# EAGLE board Password Security Access System (EAGLE 9.7.0)

Size 244.47 x 169.61 mm. Coordinates in mm from the lower left corner, seen from the top.
Outline: 0,0 244.47,0 244.47,169.61 0,169.61 0,0
Copper layers (1*16): Top 0.035mm / dielectric 1.5mm / Bottom 0.035mm
Design rules "default": minimum track width 6mil, minimum drill 0.35mm, track to track 6mil, track to pad 6mil, pad to pad 6mil, via to via 6mil, smd to smd 6mil, copper to edge 40mil, drill to drill 6mil, minimum pad ring 10mil, minimum via ring 8mil, stop-mask expansion 4mil, vias tented up to drill 0mil, thermal gap 10mil

## Footprints (pad centres in the part's own frame; a part is rotated, then mirrored left to right if it is on the bottom)
LEDRD254W60D565H860B_G = drill 0.981 pad 1.581: 1 -1.27,0; 2 1.27,0
LEDRD254W60D565H860B = drill 0.981 pad 1.581: 1 -1.27,0; 2 1.27,0
1X08 = drill 1.016 long: 1 -8.89,0; 2 -6.35,0; 3 -3.81,0; 4 -1.27,0; 5 1.27,0; 6 3.81,0; 7 6.35,0; 8 8.89,0
PIEZO = drill 1 pad 1.6: 1 -3.5,0; 2 3.5,0
RESAD1016W63L850D250B = drill 0.83 pad 1.43: 1 -5.08,0; 2 5.08,0
SG90 = drill 1.016 long: 1 -2.54,0; 2 0,0; 3 2.54,0
ARDUINO-UNO-R3-SHIELD = drill 1.016 pad 1.88: 3.3V 24.13,-2.54; 5V 24.13,0; A0 24.13,12.7; A1 24.13,15.24; A2 24.13,17.78; A3 24.13,20.32; A4 24.13,22.86; A5 24.13,25.4; AREF -24.13,-13.97; D2 -24.13,20.32; D3 -24.13,17.78; D4 -24.13,15.24; D5 -24.13,12.7; D6 -24.13,10.16; D7 -24.13,7.62; D8 -24.13,3.81; D9 -24.13,1.27; D10 -24.13,-1.27; D11 -24.13,-3.81; D12 -24.13,-6.35; D13 -24.13,-8.89; GND@0 24.13,2.54; GND@1 24.13,5.08; GND@2 -24.13,-11.43; IOREF 24.13,-7.62; NC 24.13,-10.16; RES 24.13,-5.08; RX -24.13,25.4; SCL -24.13,-19.05; SDA -24.13,-16.51; TX -24.13,22.86; VIN 24.13,7.62
JHD-162A = drill 1.016 long: 1 -19.05,0; 2 -16.51,0; 3 -13.97,0; 4 -11.43,0; 5 -8.89,0; 6 -6.35,0; 7 -3.81,0; 8 -1.27,0; 9 1.27,0; 10 3.81,0; 11 6.35,0; 12 8.89,0; 13 11.43,0; 14 13.97,0; 15 16.51,0; 16 19.05,0

## Placement (x,y rotation side)
D1  GREEN  [LEDRD254W60D565H860B_G]  154.93,24.33 180 top
D2  RED  [LEDRD254W60D565H860B]  167.63,24.33 180 top
KEYPAD1  KEYPAD-4X4  [1X08]  112.05,163.33 0 top
PIEZO1  PIEZO  [PIEZO]  190.49,39.57 0 top
R1  1k  [RESAD1016W63L850D250B]  153.66,16.71 90 top
R2  1k  [RESAD1016W63L850D250B]  166.36,16.71 90 top
R3  1k  [RESAD1016W63L850D250B]  184.14,31.95 90 top
R4  1k  [RESAD1016W63L850D250B]  174.87,140.3 90 top
R5  1k  [RESAD1016W63L850D250B]  207.89,140.3 90 top
SERVO1  SERVOSG90  [SG90]  234.6,41.94 90 top
U1  ARDUINO-UNO-R3-SHIELD  [ARDUINO-UNO-R3-SHIELD]  48.05,121.45 270 top
U2  ARDUINO-UNO-R3-SHIELD  [ARDUINO-UNO-R3-SHIELD]  47.88,29.84 270 top
U3  LCD-16X2JHD-162A  [JHD-162A]  188.84,125.19 0 top

## Library data of the parts
D1 = Tinkercad; CATEGORY: Opto-Electronic; SUB-CATEGORY: LED; VALUE: LED_GREEN
D2 = Tinkercad; CATEGORY: Opto-Electronic; SUB-CATEGORY: LED; VALUE: LED_RED
KEYPAD1 PIEZO1 R1-R5 SERVO1 U1-U3 = Tinkercad

## Nets
D1_C: D1.2 R1.2
D2_C: D2.2 R2.2
PIEZO1_1: PIEZO1.1 R3.2
U1_5V: U1.5V U3.2 U3.15
U1_A0: KEYPAD1.5 U1.A0
U1_A1: KEYPAD1.6 U1.A1
U1_A2: KEYPAD1.7 U1.A2
U1_A3: KEYPAD1.8 U1.A3
U1_A4: U1.A4 U2.A4
U1_A5: U1.A5 U2.A5
U1_D3: U1.D3 U3.13
U1_D4: U1.D4 U3.12
U1_D5: U1.D5 U3.11
U1_D6: KEYPAD1.1 U1.D6
U1_D7: KEYPAD1.2 U1.D7
U1_D8: KEYPAD1.3 U1.D8
U1_D9: KEYPAD1.4 U1.D9
U1_D11: U1.D11 U3.6
U1_D12: U1.D12 U3.4
U1_D13: U1.D13 U3.14
U2_5V: SERVO1.2 U2.5V
U2_D4: SERVO1.3 U2.D4
U2_D5: R3.1 U2.D5
U2_D9: D2.1 U2.D9
U2_D10: D1.1 U2.D10
U2_GND: PIEZO1.2 R1.1 R2.1 R4.2 R5.2 SERVO1.1 U1.GND@0 U1.GND@1 U1.GND@2 U2.GND@0 U2.GND@1 U2.GND@2 U3.1 U3.5
U3_LED-: R5.1 U3.16
U3_VO: R4.1 U3.3

## Tracks (layer width: path | path; a pad name or v marks a point on that pad's centre or on a via)
D1_C  (1 unrouted)
D2_C  (1 unrouted)
PIEZO1_1  (1 unrouted)
U1_5V  (2 unrouted)
U1_A0  (1 unrouted)
U1_A1  (1 unrouted)
U1_A2  (1 unrouted)
U1_A3  (1 unrouted)
U1_A4  (1 unrouted)
U1_A5  (1 unrouted)
U1_D3  (1 unrouted)
U1_D4  (1 unrouted)
U1_D5  (1 unrouted)
U1_D6  (1 unrouted)
U1_D7  (1 unrouted)
U1_D8  (1 unrouted)
U1_D9  (1 unrouted)
U1_D11  (1 unrouted)
U1_D12  (1 unrouted)
U1_D13  (1 unrouted)
U2_5V  (1 unrouted)
U2_D4  (1 unrouted)
U2_D5  (1 unrouted)
U2_D9  (1 unrouted)
U2_D10  (1 unrouted)
U2_GND  (13 unrouted)
U3_LED-  (1 unrouted)
U3_VO  (1 unrouted)